# Altium PCB DONUt_v0.0.PcbDoc (part 2 of 2)
Units mm, origin at the board's own origin, x right, y up, seen from the top; angles counter-clockwise.
Board outline 170 x 70 mm, 2 copper layers (Top Layer, Bottom Layer); 266 components, 203 nets, 883 pads, 488 vias.
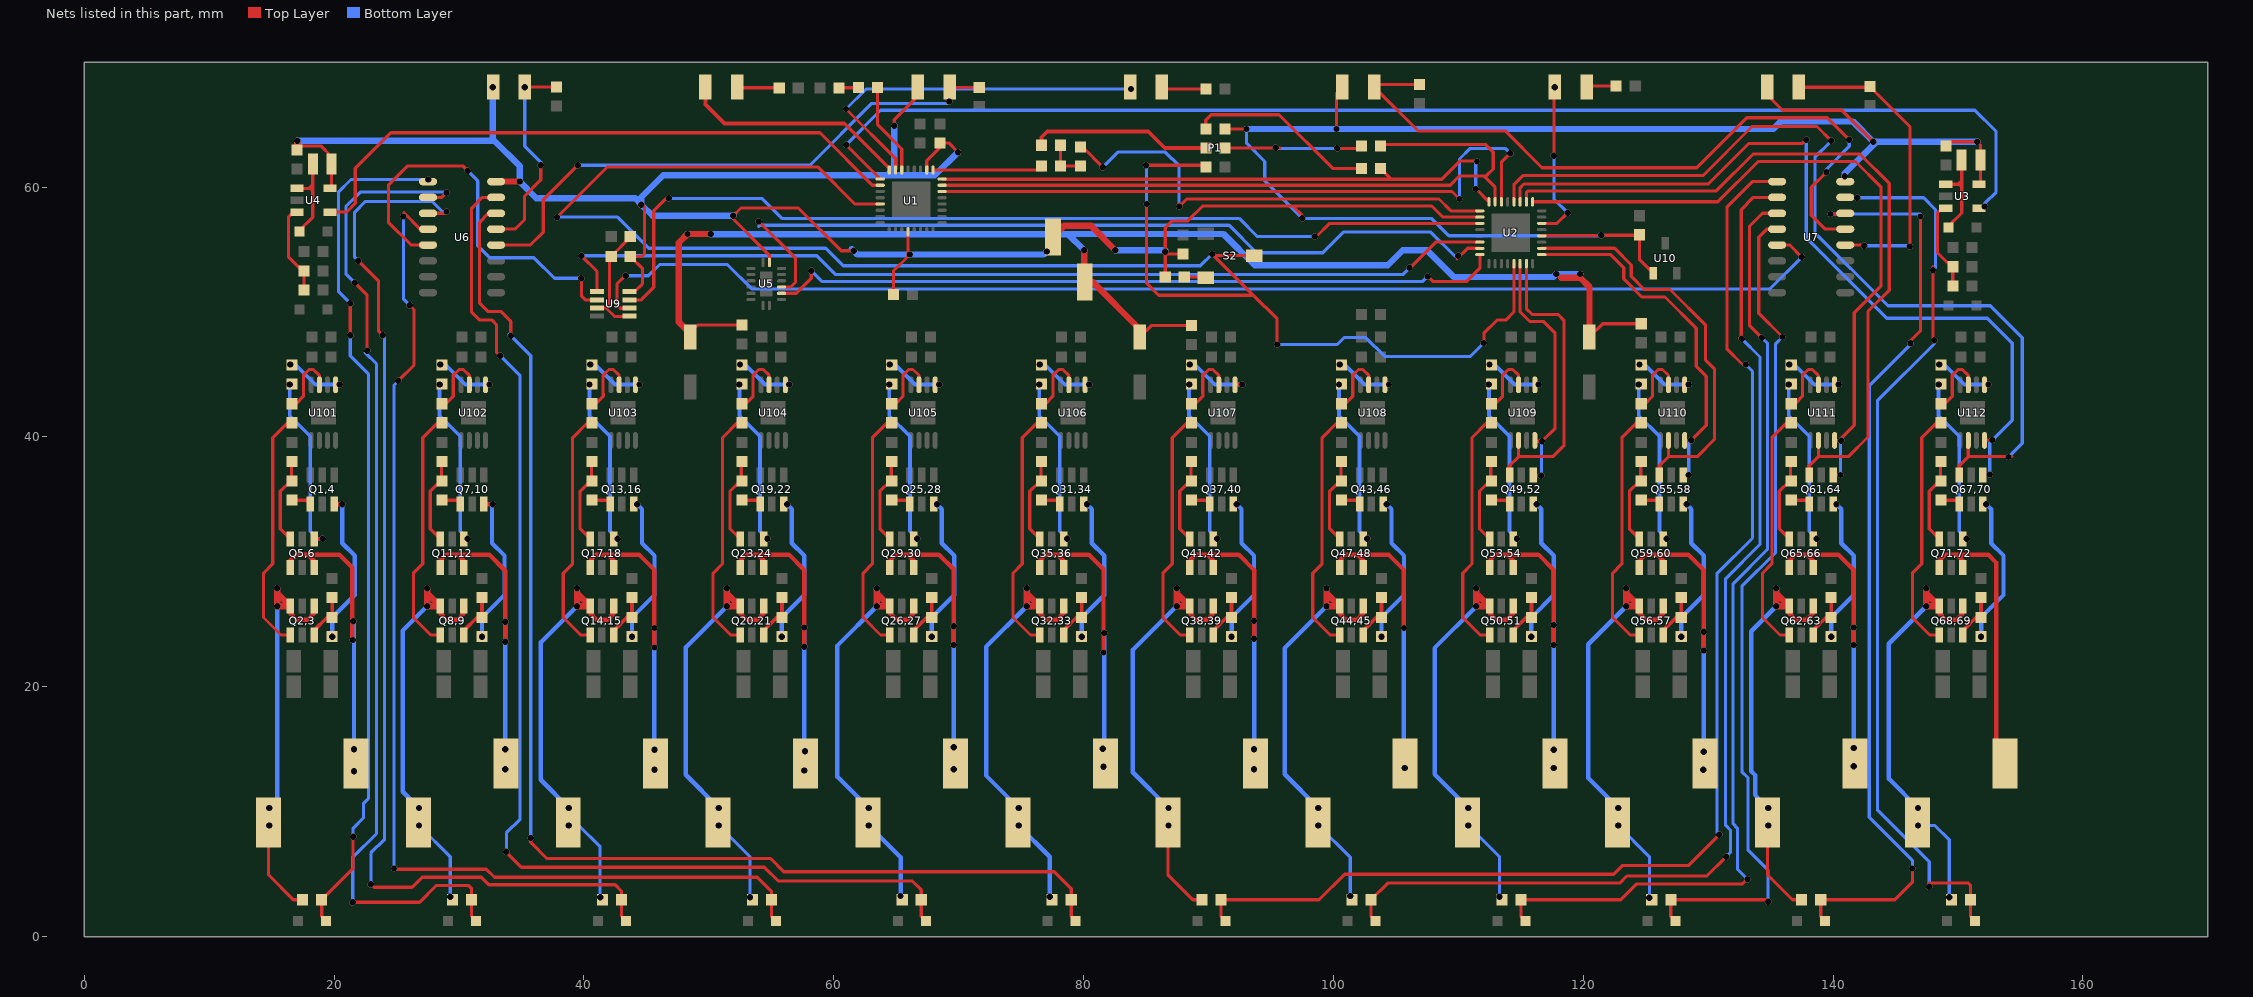
[diagram p2: the nets of this part, all layers, seen from the top]

## Via types
v1: diameter 0.508, hole 0.508, Top Layer to Bottom Layer, 488 vias

## Nets (pads, with @x,y where several pads share a name; then routed paths per layer and width w, separated by ;. In a path a pad name is that pad's centre, name@x,y a point inside that pad or via, vN(x,y) a via of type N, cw(c..) or ccw(c..) an arc to the next point about the centre after c; other vN are vias at no path point) (continued)
M9+: Q49,52.1 U2.30 U109.4 | length 20.3
  Top Layer w0.254: U2.30@114.95,53.875 114.95,50 115.7,49.25 116.8,49.25 117.75,48.3 117.75,40.7 v1(116.7,39.65) U109.4@116.2,39.65 ; 116.05,36.9 v1(116.65,36.9)
  Bottom Layer w0.254: v1(116.65,36.9) 116.65,39.6 v1(116.7,39.65)
M9-: Q49,52.3 U2.31 U109.2 | length 24.1
  Top Layer w0.254: 114.1,36.95 114.1,37.7 114.825,38.425 ; U109.2@114.825,39.725 114.825,38.425 ; U2.31@115.45,53.875 115.45,50.275 115.925,49.8 118,49.8 118.45,49.35 118.45,39.3 117.575,38.425 114.825,38.425
M10+: Q55,58.1 U2.1 U110.4 | length 28.5
  Top Layer w0.254: U2.1@116.675,54.6 122.2,54.6 123.25,53.55 123.25,52.65 124.7,51.2 126.55,51.2 129.05,48.7 129.05,45.65 129.85,44.85 129.85,40.925 v1(128.65,39.725) U110.4@128.125,39.725
  Bottom Layer w0.254: v1(128.45,36.95) 128.45,39.525 v1(128.65,39.725)
M10-: Q55,58.3 U2.2 U110.2 | length 33
  Top Layer w0.254: U2.2@116.675,55.1 122.515,55.1 123.85,53.765 123.85,52.85 124.9,51.8 126.95,51.8 129.8,48.95 129.8,46.15 130.5,45.45 130.5,39.8 129.125,38.425 126.825,38.425 ; 126.1,36.95 126.1,37.7 126.825,38.425 ; U110.2@126.825,39.725 126.825,38.425
M11+: Q61,64.1 U2.9 U111.4 | length 55.6
  Top Layer w0.254: U2.9@115.95,58.825 130.775,58.825 134,62.05 141.8,62.05 143.85,60 143.85,52.1 141.7,49.95 141.7,40.95 140.65,39.9 v1(140.65,39.7) U111.4@140.15,39.7 ; 140,36.95 v1(140.6,36.95)
  Bottom Layer w0.254: v1(140.6,36.95) 140.6,39.65 v1(140.65,39.7)
M11-: Q61,64.3 U2.10 U111.2 | length 60.7
  Top Layer w0.254: U2.10@115.45,58.825 115.45,59.55 115.6,59.7 130.65,59.7 133.6,62.65 142.15,62.65 144.5,60.3 144.5,51.75 142.8,50.05 142.8,40 141.225,38.425 138.825,38.425 ; 138.1,36.95 138.1,37.7 138.825,38.425 ; U111.2@138.825,39.725 138.825,38.425
M12+: Q67,70.1 U2.11 U112.4 | length 65.3
  Top Layer w0.254: U2.11@114.95,58.825 114.95,59.95 115.25,60.25 130.025,60.25 ; 130.063,60.287 133.275,63.5 137.55,63.5 v1(137.85,63.8) ; U112.4@152.15,39.75 v1(152.75,39.75)
  Bottom Layer w0.254: v1(137.85,63.8) 137.85,55.95 138.4,55.4 144.3,49.5 152.35,49.5 154.35,47.5 154.35,41.35 v1(152.75,39.75) 152.55,39.55 v1(152.55,37)
M12-: Q67,70.3 U2.12 U112.2 | length 73.8
  Top Layer w0.254: U2.12@114.45,58.825 114.45,60.2 115.175,60.925 129.588,60.925 133.513,64.85 138.716,64.85 v1(139.844,63.722) ; 150.1,36.95 150.1,37.7 150.825,38.425 ; U112.2@150.825,39.725 150.825,38.425 ; 154.325,38.425 150.825,38.425
  Bottom Layer w0.254: v1@139.844,63.75 v1(139.844,63.722) 139.844,63.694 138.55,62.4 138.55,56.35 144.4,50.5 152.6,50.5 155.15,47.95 155.15,39.5 v1(154.05,38.4)
MISO: R3.2 U1.16 U2.16 | length 48.4
  Top Layer w0.254: U1.16@68.675,60.65 68.692,60.633 104.629,60.633 ; R3.2@103.762,61.5 104.629,60.633 ; v1(111.4,59.85) 111.425,59.85 U2.16@112.45,58.825 ; v1(111.5,62.05) 111.45,62.1 110.15,62.1 108.683,60.633 104.629,60.633
  Bottom Layer w0.254: v1(111.4,59.85) 111.4,61.95 v1(111.5,62.05)
MISO_PRGM: P1.1 R3.1 | length 15.1
  Top Layer w0.254: P1.1@89.788,64.662 89.788,65.363 90.225,65.8 95.65,65.8 99.95,61.5 R3.1@102.238,61.5
MOSI: R5.2 U1.15 U2.15 | length 57.7
  Top Layer w0.254: U1.15@68.675,60.15 109.35,60.15 110.1,60.9 112.025,60.9 ; R5.2@103.862,63.4 112.2,63.4 112.8,62.8 112.8,61.45 112.25,60.9 112.025,60.9 ; U2.15@112.95,58.825 112.95,59.975 112.025,60.9
MOSI_PRGM: P1.4 R5.1 | length 11
  Top Layer w0.254: P1.4@91.312,63.138 v1(95.4,63.138) 95.738,63.138 ; v1(100.3,63.1) R5.1@102.038,63.1
  Bottom Layer w0.254: v1@95.512,63.1 v1(100.3,63.1)
mux1_out: U6.5 U9.2 | length 32.5
  Top Layer w0.254: U6.5@27.525,55.365 26.173,55.365 24.35,57.188 24.35,60.15 25.9,61.7 30.3,61.7 v1(30.7,61.3) ; v1(39.8,52.7) 39.8,51.3 40.125,50.975 U9.2@41.05,50.975
  Bottom Layer w0.254: v1(30.7,61.3) 31.5,60.5 31.5,55.3 32.45,54.35 36,54.35 37.65,52.7 v1(39.8,52.7)
mux2_out: U7.5 U9.6 | length 102.6
  Top Layer w0.254: v1(43.35,52.9) 43.3,52.9 42.65,52.25 42.65,50.55 42.9,50.3 U9.6@43.725,50.3 ; U7.5@135.525,55.365 136.535,55.365 v1(137.5,54.4)
  Bottom Layer w0.254: v1(43.35,52.9) 45.15,52.9 46.05,53.8 51.5,53.8 53.45,51.85 119.65,51.85 134.95,51.85 v1(137.5,54.4)
NetB1_1: B1.1 B2.1 B3.1 C314.2 C315.2 C316.2 S1.2 | length 116.2
  Top Layer w0.254: B1.1@48.5,48 48.5,48.3 48.5,48.35 49.112,48.962 C314.2@52.65,48.962 ; B2.1@84.5,48 85.412,48.912 C315.2@88.65,48.912 C315.2@88.403,48.665 ; B3.1@120.5,48 121.562,49.062 C316.2@124.65,49.062
  Top Layer w0.508: B1.1@48.5,48.3 47.6,49.2 47.6,55.55 v1(48.3,56.25) v1(50.15,56.25) ; S1.2@80.05,52.445 v1(80.05,54.95) ; S1.2@80.095,52.4 80.725,52.4 84.5,48.625 B2.1@84.5,48 ; 118.25,52.75 119.75,52.75 120.5,52 B3.1@120.5,48
  Bottom Layer w0.508: v1(48.3,56.25) v1(50.15,56.25) 50.166,56.234 78.734,56.234 78.75,56.25 ; v1(80.05,54.95) 78.75,56.25 ; v1(119.75,53.05) v1(117.85,53.05) 117.6,52.8 109.65,52.8 107.5,54.95 105.555,54.95 104.355,53.75 93.7,53.75 91.2,56.25 78.75,56.25
NetD1_1: D1.1 U1.22 | length 7.4
  Top Layer w0.254: D1.1@63.512,67.962 63.512,64.988 65.449,63.051 U1.22@65.449,61.376
NetD1_2: D1.2 R7.1 | length 1.6
  Top Layer w0.3: R7.1@60.412,67.95 D1.2@61.976,67.95
NetD2_1: D2.1 U1.23 | length 30
  Top Layer w0.254: v1(60.988,66.25) 64.931,62.307 ; U1.23@64.95,61.375 64.95,62.288
  Bottom Layer w0.254: v1(60.988,66.25) 62.588,67.85 v1(83.8,67.85)
NetD2_2: D2.2 R8.2 | length 3.4
  Top Layer w0.254: D2.2@86.42,67.85 R8.2@89.788,67.85
NetD3_1: D3.1 U1.24 | length 18.3
  Top Layer w0.254: 60.85,65.1 64.45,61.5 U1.24@64.45,61.375
  Top Layer w0.3: D3.1@49.73,68 49.73,66.62 51.25,65.1 60.85,65.1
NetD3_2: D3.2 R9.2 | length 3.3
  Top Layer w0.3: D3.2@52.32,67.95 R9.2@55.638,67.95
NetD4_1: D4.1 U2.6 | length 12.9
  Top Layer w0.254: U2.6@116.675,57.1 117.9,57.1 v1(118.75,57.95) ; v1(117.65,62.5) D4.1@117.65,67.92
  Bottom Layer w0.254: v1(117.65,62.5) 117.65,59.05 v1(118.75,57.95)
  other v1: 117.73,68
NetD4_2: D4.2 R10.2 | length 2.3
  Top Layer w0.254: D4.2@120.37,68.1 R10.2@122.638,68.1
NetD301_A: D301.A L1.2 U3.1 | length 8
  Top Layer w0.254: U3.1@149.025,60.225 150.025,60.225 ; D301.A@149.23,56.775 149.23,56.855 150.3,57.925 150.3,60.225 ; L1.2@150.3,62.175 150.3,60.5 ; 150.025,60.225 150.1,60.225 ; 150.025,60.225 150.3,60.5 ; 150.1,60.225 150.3,60.225 ; 150.1,60.225 150.3,60.025 150.3,60.225 ; 150.3,60.225 150.3,60.5
NetD302_A: D302.A L2.2 U4.1 | length 8
  Top Layer w0.254: U4.1@17.025,59.9 18.025,59.9 ; D302.A@17.23,56.45 17.23,56.53 18.3,57.6 18.3,59.9 ; L2.2@18.3,61.85 18.3,60.175 ; 18.025,59.9 18.3,60.175 ; 18.025,59.9 18.1,59.9 ; 18.1,59.9 18.3,59.7 18.3,59.9 ; 18.1,59.9 18.3,59.9 ; 18.3,59.9 18.3,60.175
NetM1_1: M1.1 Q5,6.4 Q5,6.6 | length 25.8
  Top Layer w0.356: 16.5,29.55 16.5,30.111 16.971,30.582 17.929,30.582 ; 18.4,29.55 18.4,30.1 18.182,30.318 18.182,30.329 17.929,30.582 ; M1.1@21.05,14.55 M1.1@21.45,14.95 ; v1(21.5,23.75) 21.45,23.8 21.45,29.55 20.418,30.582 17.929,30.582
  Bottom Layer w0.356: v1(21.55,25.25) 21.6,25.2 v1(21.6,15) v1(21.6,13.25)
NetM1_2: M1.2 Q2,3.4 Q2,3.6 R173.2 | length 34.8
  Top Layer w0.254: M1.2@14.75,9.15 14.75,4.95 16.75,2.95 R173.2@17.488,2.95
  Top Layer w0.356: M1.2@15.1,10.1 M1.2@15.4,9.8 ; 16.5,26.45 16.5,25.889 17.039,25.35 17.861,25.35 18.4,25.889 18.4,26.45
  Top Layer w0.508: v1@15.45,27.75 15.45,27.5 ; 15.45,27.5 16.5,26.45 v1(15.45,26.45) 15.45,27.5
  Bottom Layer w0.356: v1(14.8,8.9) v1(14.8,10.3) 15.45,10.95 v1(15.45,26.45) v1(15.45,27.9)
NetM2_1: M2.1 Q11,12.4 Q11,12.6 | length 25.2
  Top Layer w0.356: 28.5,29.55 28.5,30.111 28.971,30.582 29.929,30.582 ; 30.4,29.55 30.4,30.1 30.182,30.318 30.182,30.329 29.929,30.582 ; v1(33.7,23.6) v1(33.7,25.2) 33.7,29.3 32.418,30.582 29.929,30.582
  Bottom Layer w0.356: v1(33.7,13.4) v1(33.7,15) v1(33.7,23.6) v1(33.7,25.2)
NetM2_2: M2.2 Q8,9.4 Q8,9.6 R174.2 | length 34.8
  Top Layer w0.356: M2.2@27.1,10.1 M2.2@27.4,9.8 ; 28.5,26.45 28.5,25.889 29.039,25.35 29.861,25.35 30.4,25.889 30.4,26.45
  Top Layer w0.508: v1@27.45,27.75 27.45,27.5 ; 27.45,27.5 28.5,26.45 v1(27.45,26.45) 27.45,27.5
  Bottom Layer w0.254: v1(26.8,8.9) 29.3,6.4 v1(29.3,3.2)
  Bottom Layer w0.356: v1(26.8,8.9) v1(26.8,10.3) 25.5,11.6 25.5,24.5 v1(27.45,26.45) v1(27.45,27.9)
NetM3_1: M3.1 Q17,18.4 Q17,18.6 | length 25.2
  Top Layer w0.356: 40.5,29.55 40.5,30.111 40.971,30.582 41.929,30.582 ; 42.4,29.55 42.4,30.1 42.182,30.318 42.182,30.329 41.929,30.582 ; v1(45.65,23.15) v1(45.65,24.7) 45.65,29.35 44.418,30.582 41.929,30.582
  Bottom Layer w0.356: v1(45.65,13.35) v1(45.65,14.95) v1(45.65,23.15) v1(45.65,24.7)
NetM3_2: M3.2 Q14,15.4 Q14,15.6 R175.2 | length 36.1
  Top Layer w0.356: M3.2@39.1,10.1 M3.2@39.4,9.8 ; 40.5,26.45 40.5,25.889 41.039,25.35 41.861,25.35 42.4,25.889 42.4,26.45
  Top Layer w0.508: v1@39.45,27.75 39.45,27.5 ; 39.45,27.5 40.5,26.45 v1(39.45,26.45) 39.45,27.5
  Bottom Layer w0.254: v1(38.8,8.9) 39.6,8.9 41.3,7.2 v1(41.3,3.15)
  Bottom Layer w0.356: v1(38.8,8.9) v1(38.8,10.3) 36.55,12.55 36.55,23.55 v1(39.45,26.45) v1(39.45,27.9)
NetM4_1: M4.1 Q23,24.4 Q23,24.6 | length 26.1
  Top Layer w0.356: 52.5,29.55 52.5,30.111 52.971,30.582 53.929,30.582 ; 54.4,29.55 54.4,30.1 54.182,30.318 54.182,30.329 53.929,30.582 ; M4.1@57.05,14.55 M4.1@57.65,15.15 ; v1(57.65,23.2) v1(57.65,24.75) 57.65,29.35 56.418,30.582 53.929,30.582
  Bottom Layer w0.356: v1(57.65,13.3) v1(57.65,23.2) v1(57.65,24.75)
  other v1: 57.7,14.85
NetM4_2: M4.2 Q20,21.4 Q20,21.6 R176.2 | length 36
  Top Layer w0.356: M4.2@51.1,10.1 M4.2@51.4,9.8 ; 52.5,26.45 52.5,25.889 53.039,25.35 53.861,25.35 54.4,25.889 54.4,26.45
  Top Layer w0.508: v1@51.45,27.75 51.45,27.5 ; 51.45,27.5 52.5,26.45 v1(51.45,26.45) 51.45,27.5
  Bottom Layer w0.254: v1(50.8,8.9) 53.3,6.4 v1(53.3,3.15)
  Bottom Layer w0.356: v1(50.8,8.9) v1(50.8,10.3) 48.15,12.95 48.15,23.15 v1(51.45,26.45) v1(51.45,27.9)
NetM5_1: M5.1 Q29,30.4 Q29,30.6 | length 25.9
  Top Layer w0.356: 64.5,29.55 64.5,30.111 64.971,30.582 65.929,30.582 ; 66.4,29.55 66.4,30.1 66.182,30.318 66.182,30.329 65.929,30.582 ; M5.1@69.05,14.55 M5.1@69.6,15.1 ; v1(69.6,23.35) v1(69.6,24.85) 69.6,29.4 68.418,30.582 65.929,30.582
  Bottom Layer w0.356: v1(69.6,13.4) v1(69.6,15.15) v1(69.6,23.35) v1(69.6,24.85)
NetM5_2: M5.2 Q26,27.4 Q26,27.6 R177.2 | length 35.8
  Top Layer w0.356: M5.2@63.1,10.1 M5.2@63.4,9.8 ; 64.5,26.45 64.5,25.889 65.039,25.35 65.861,25.35 66.4,25.889 66.4,26.45
  Top Layer w0.508: v1@63.45,27.75 63.45,27.5 ; 63.45,27.5 64.5,26.45 v1(63.45,26.45) 63.45,27.5
  Bottom Layer w0.356: v1(63.45,27.9) v1(63.45,26.45) 60.3,23.3 60.3,12.8 v1(62.8,10.3) v1(62.8,8.9) 65.35,6.35 v1(65.35,3.25)
NetM6_1: M6.1 Q35,36.4 Q35,36.6 | length 25.7
  Top Layer w0.356: 76.5,29.55 76.5,30.111 76.971,30.582 77.929,30.582 ; 78.4,29.55 78.4,30.1 78.182,30.318 78.182,30.329 77.929,30.582 ; M6.1@81.05,14.55 M6.1@81.6,15.1 ; v1(81.6,22.75) 81.6,29.4 80.418,30.582 77.929,30.582
  Bottom Layer w0.356: v1(81.6,13.6) 81.65,13.65 v1(81.65,24.3)
  other v1: 81.55,15.05
NetM6_2: M6.2 Q32,33.4 Q32,33.6 R178.2 | length 35.9
  Top Layer w0.356: M6.2@75.1,10.1 M6.2@75.4,9.8 ; 76.5,26.45 76.5,25.889 77.039,25.35 77.861,25.35 78.4,25.889 78.4,26.45
  Top Layer w0.508: v1@75.45,27.75 75.45,27.5 ; 75.45,27.5 76.5,26.45 v1(75.45,26.45) 75.45,27.5
  Bottom Layer w0.356: v1(75.45,27.9) v1(75.45,26.45) 72.2,23.2 72.2,12.9 v1(74.8,10.3) v1(74.8,8.9) 77.3,6.4 v1(77.3,3.2)
NetM7_1: M7.1 Q41,42.4 Q41,42.6 | length 25.9
  Top Layer w0.356: 88.5,29.55 88.5,30.111 88.971,30.582 89.929,30.582 ; 90.4,29.55 90.4,30.1 90.182,30.318 90.182,30.329 89.929,30.582 ; M7.1@93.05,14.55 M7.1@93.65,15.15 ; v1(93.65,23.85) v1(93.65,25.3) 93.65,29.35 92.418,30.582 89.929,30.582
  Bottom Layer w0.356: v1(93.65,13.4) v1(93.65,15) v1(93.65,23.85) v1(93.65,25.3)
NetM7_2: M7.2 Q38,39.4 Q38,39.6 R179.2 | length 37.1
  Top Layer w0.254: M7.2@86.75,9.15 86.75,4.95 88.75,2.95 R179.2@89.488,2.95
  Top Layer w0.356: M7.2@87.1,10.1 M7.2@87.4,9.8 ; 88.5,26.45 88.5,25.889 89.039,25.35 89.861,25.35 90.4,25.889 90.4,26.45
  Top Layer w0.508: v1@87.45,27.75 87.45,27.5 ; 87.45,27.5 88.5,26.45 v1(87.45,26.45) 87.45,27.5
  Bottom Layer w0.356: v1(86.8,8.9) v1(86.8,10.3) 83.95,13.15 83.95,22.95 v1(87.45,26.45) v1(87.45,27.9)
NetM8_1: M8.1 Q47,48.4 Q47,48.6 | length 23.4
  Top Layer w0.356: 100.5,29.55 100.5,30.111 100.971,30.582 101.929,30.582 ; 102.4,29.55 102.4,30.1 102.182,30.318 102.182,30.329 101.929,30.582 ; v1(105.65,24.7) 105.65,29.35 104.418,30.582 101.929,30.582
  Bottom Layer w0.356: v1@105.65,13.55 v1(105.65,24.7)
  other v1: 105.7,13.5
NetM8_2: M8.2 Q44,45.4 Q44,45.6 R180.2 | length 35.9
  Top Layer w0.356: M8.2@99.1,10.1 M8.2@99.4,9.8 ; 100.5,26.45 100.5,25.889 101.039,25.35 101.861,25.35 102.4,25.889 102.4,26.45
  Top Layer w0.508: v1@99.45,27.75 99.45,27.5 ; 99.45,27.5 100.5,26.45 v1(99.45,26.45) 99.45,27.5
  Bottom Layer w0.254: v1(98.8,8.9) 101.35,6.35 v1(101.35,3.25)
  Bottom Layer w0.356: v1(98.8,8.9) v1(98.8,10.3) 96.1,13 96.1,23.1 v1(99.45,26.45) v1(99.45,27.9)
NetM9_1: M9.1 Q53,54.4 Q53,54.6 | length 25.9
  Top Layer w0.356: 112.5,29.55 112.5,30.111 112.971,30.582 113.929,30.582 ; 114.4,29.55 114.4,30.1 114.182,30.318 114.182,30.329 113.929,30.582 ; M9.1@117.05,14.55 M9.1@117.65,15.15 ; v1(117.65,23.35) v1(117.65,24.95) 117.65,29.35 116.418,30.582 113.929,30.582
  Bottom Layer w0.356: v1(117.65,13.5) v1(117.65,14.95) v1(117.65,23.35) v1(117.65,24.95)
NetM9_2: M9.2 Q50,51.4 Q50,51.6 R181.2 | length 36
  Top Layer w0.356: M9.2@111.1,10.1 M9.2@111.4,9.8 ; 112.5,26.45 112.5,25.889 113.039,25.35 113.861,25.35 114.4,25.889 114.4,26.45
  Top Layer w0.508: v1@111.45,27.75 111.45,27.5 ; 111.45,27.5 112.5,26.45 v1(111.45,26.45) 111.45,27.5
  Bottom Layer w0.254: v1(110.8,8.9) 113.3,6.4 v1(113.3,3.2)
  Bottom Layer w0.356: v1(110.8,8.9) v1(110.8,10.3) 108.1,13 108.1,23.1 v1(111.45,26.45) v1(111.45,27.9)
NetM10_1: M10.1 Q59,60.4 Q59,60.6 | length 26
  Top Layer w0.356: 124.5,29.55 124.5,30.111 124.971,30.582 125.929,30.582 ; 126.4,29.55 126.4,30.1 126.182,30.318 126.182,30.329 125.929,30.582 ; M10.1@129.05,14.55 M10.1@129.65,15.15 ; v1(129.65,22.9) v1(129.65,24.4) 129.65,29.35 128.418,30.582 125.929,30.582
  Bottom Layer w0.356: v1(129.6,13.35) 129.65,13.4 v1(129.65,14.8) v1(129.65,22.9) v1(129.65,24.4)
NetM10_2: M10.2 Q56,57.4 Q56,57.6 R182.2 | length 35.8
  Top Layer w0.356: M10.2@123.1,10.1 M10.2@123.4,9.8 ; 124.5,26.45 124.5,25.889 125.039,25.35 125.861,25.35 126.4,25.889 126.4,26.45
  Top Layer w0.508: v1@123.45,27.75 123.45,27.5 ; 123.45,27.5 124.5,26.45 v1(123.45,26.45) 123.45,27.5
  Bottom Layer w0.254: v1(122.8,8.9) 125.3,6.4 v1(125.3,3.1)
  Bottom Layer w0.356: v1(122.8,8.9) v1(122.8,10.3) 120.4,12.7 120.4,23.4 v1(123.45,26.45) v1(123.45,27.9)
NetM11_1: M11.1 Q65,66.4 Q65,66.6 | length 25.6
  Top Layer w0.356: 136.5,29.55 136.5,30.111 136.971,30.582 137.929,30.582 ; 138.4,29.55 138.4,30.1 138.182,30.318 138.182,30.329 137.929,30.582 ; M11.1@141.05,14.55 M11.1@141.65,15.15 ; v1(141.65,23.35) 141.65,29.35 140.418,30.582 137.929,30.582
  Bottom Layer w0.356: v1(141.65,13.65) v1(141.65,23.35) v1(141.65,24.75)
  other v1: 141.65,15.1
NetM11_2: M11.2 Q62,63.4 Q62,63.6 R183.2 | length 35.9
  Top Layer w0.254: M11.2@134.75,9.15 134.75,4.95 136.75,2.95 R183.2@137.488,2.95
  Top Layer w0.356: M11.2@135.1,10.1 M11.2@135.4,9.8 ; 136.5,26.45 136.5,25.889 137.039,25.35 137.861,25.35 138.4,25.889 138.4,26.45
  Top Layer w0.508: v1@135.45,27.75 135.45,27.5 ; 135.45,27.5 136.5,26.45 v1(135.45,26.45) 135.45,27.5
  Bottom Layer w0.356: v1(134.8,8.9) v1(134.8,10.3) 133.759,11.341 133.759,12.931 133.45,13.24 133.45,24.45 v1(135.45,26.45) v1(135.45,27.9)
NetM12_1: M12.1 Q71,72.4 Q71,72.6 | length 22.2
  Top Layer w0.356: 148.5,29.55 148.5,30.111 148.971,30.582 149.929,30.582 ; 150.4,29.55 150.4,30.1 150.182,30.318 150.182,30.329 149.929,30.582 ; M12.1@153.05,14.55 153.05,29.95 152.418,30.582 149.929,30.582
NetM12_2: M12.2 Q68,69.4 Q68,69.6 R184.2 | length 36.5
  Top Layer w0.356: M12.2@147.1,10.1 M12.2@147.4,9.8 ; 148.5,26.45 148.5,25.889 149.039,25.35 149.861,25.35 150.4,25.889 150.4,26.45
  Top Layer w0.508: v1@147.45,27.75 147.45,27.5 ; 147.45,27.5 148.5,26.45 v1(147.45,26.45) 147.45,27.5
  Bottom Layer w0.254: v1(146.8,8.9) 148.15,8.9 149.3,7.75 v1(149.3,3.15)
  Bottom Layer w0.356: v1(146.8,8.9) v1(146.8,10.3) 144.45,12.65 144.45,23.45 v1(147.45,26.45) v1(147.45,27.9)
NetQ1,4_4: Q1,4.4 R104.1 | length 1.6
  Top Layer w0.3: R104.1@16.65,34.938 17.812,34.938 18.1,34.65
NetQ1,4_6: Q1,4.6 R102.1 | length 12.4
  Top Layer w0.35: 20.05,34.6 v1(20.65,34.6)
  Bottom Layer w0.35: v1(19.85,24) 19.85,25.55 21.65,27.35 21.65,30.5 20.65,31.5 v1(20.65,34.6)
NetQ2,3_3: Q2,3.3 R101.1 R102.2 | length 3.8
  Top Layer w0.254: 18.4,24.15 18.4,24.5 ; R102.2@19.462,25.562 R102.2@19.85,25.562
  Top Layer w0.305: 18.4,24.5 R102.2@19.462,25.562 ; R102.2@19.85,25.562 R101.1@19.85,27.138
NetQ5,6_3: Q5,6.3 R103.1 R104.2 | length 6.9
  Top Layer w0.254: 16.5,31.85 15.7,32.65 15.7,35.65 16.512,36.462 16.6,36.462 R103.1@16.6,38.038
NetQ7,10_4: Q7,10.4 R110.1 | length 1.6
  Top Layer w0.3: R110.1@28.65,34.938 29.812,34.938 30.1,34.65
NetQ7,10_6: Q7,10.6 R108.1 | length 12.4
  Top Layer w0.35: 32.05,34.6 v1(32.7,34.6)
  Bottom Layer w0.35: v1(31.85,24) 31.85,25.55 33.65,27.35 33.65,30.5 32.65,31.5 32.65,34.55 v1(32.7,34.6)
NetQ8,9_3: Q8,9.3 R107.1 R108.2 | length 3.8
  Top Layer w0.254: 30.4,24.15 30.4,24.5 ; R108.2@31.462,25.562 R108.2@31.85,25.562
  Top Layer w0.305: 30.4,24.5 R108.2@31.462,25.562 ; R108.2@31.85,25.562 R107.1@31.85,27.138
NetQ11,12_3: Q11,12.3 R109.1 R110.2 | length 6.9
  Top Layer w0.254: 28.5,31.85 27.7,32.65 27.7,35.65 28.512,36.462 28.6,36.462 R109.1@28.6,38.038
NetQ13,16_4: Q13,16.4 R116.1 | length 1.6
  Top Layer w0.3: R116.1@40.65,34.938 41.812,34.938 42.1,34.65
NetQ13,16_6: Q13,16.6 R114.1 | length 11.9
  Bottom Layer w0.35: v1(43.85,24) 43.85,25.55 45.65,27.35 45.65,30.5 44.65,31.5 44.65,34.225 v1(44.275,34.6)
NetQ14,15_3: Q14,15.3 R113.1 R114.2 | length 3.8
  Top Layer w0.254: 42.4,24.15 42.4,24.5 ; R114.2@43.462,25.562 R114.2@43.85,25.562
  Top Layer w0.305: 42.4,24.5 R114.2@43.462,25.562 ; R114.2@43.85,25.562 R113.1@43.85,27.138
NetQ17,18_3: Q17,18.3 R115.1 R116.2 | length 6.9
  Top Layer w0.254: 40.5,31.85 39.7,32.65 39.7,35.65 40.512,36.462 40.6,36.462 R115.1@40.6,38.038
NetQ19,22_4: Q19,22.4 R122.1 | length 1.6
  Top Layer w0.3: R122.1@52.65,34.938 53.812,34.938 54.1,34.65
NetQ19,22_6: Q19,22.6 R120.1 | length 11.9
  Bottom Layer w0.35: v1(55.85,24) 55.85,25.55 57.65,27.35 57.65,30.5 56.65,31.5 56.65,34.225 v1(56.275,34.6)
NetQ20,21_3: Q20,21.3 R119.1 R120.2 | length 3.8
  Top Layer w0.254: 54.4,24.15 54.4,24.5 ; R120.2@55.462,25.562 R120.2@55.85,25.562
  Top Layer w0.305: 54.4,24.5 R120.2@55.462,25.562 ; R120.2@55.85,25.562 R119.1@55.85,27.138
NetQ23,24_3: Q23,24.3 R121.1 R122.2 | length 6.9
  Top Layer w0.254: 52.5,31.85 51.7,32.65 51.7,35.65 52.512,36.462 52.6,36.462 R121.1@52.6,38.038
NetQ25,28_4: Q25,28.4 R128.1 | length 1.6
  Top Layer w0.3: R128.1@64.65,34.938 65.812,34.938 66.1,34.65
NetQ25,28_6: Q25,28.6 R126.1 | length 11.9
  Bottom Layer w0.35: v1(67.85,24) 67.85,25.55 69.65,27.35 69.65,30.5 68.65,31.5 68.65,34.225 v1(68.275,34.6)
NetQ26,27_3: Q26,27.3 R125.1 R126.2 | length 3.8
  Top Layer w0.254: 66.4,24.15 66.4,24.5 ; R126.2@67.462,25.562 R126.2@67.85,25.562
  Top Layer w0.305: 66.4,24.5 R126.2@67.462,25.562 ; R126.2@67.85,25.562 R125.1@67.85,27.138
NetQ29,30_3: Q29,30.3 R127.1 R128.2 | length 6.9
  Top Layer w0.254: 64.5,31.85 63.7,32.65 63.7,35.65 64.512,36.462 64.6,36.462 R127.1@64.6,38.038
NetQ31,34_4: Q31,34.4 R134.1 | length 1.6
  Top Layer w0.3: R134.1@76.65,34.938 77.812,34.938 78.1,34.65
NetQ31,34_6: Q31,34.6 R132.1 | length 11.9
  Bottom Layer w0.35: v1(79.85,24) 79.85,25.55 81.65,27.35 81.65,30.5 80.65,31.5 80.65,34.225 v1(80.275,34.6)
NetQ32,33_3: Q32,33.3 R131.1 R132.2 | length 3.8
  Top Layer w0.254: 78.4,24.15 78.4,24.5 ; R132.2@79.462,25.562 R132.2@79.85,25.562
  Top Layer w0.305: 78.4,24.5 R132.2@79.462,25.562 ; R132.2@79.85,25.562 R131.1@79.85,27.138
NetQ35,36_3: Q35,36.3 R133.1 R134.2 | length 6.9
  Top Layer w0.254: 76.5,31.85 75.7,32.65 75.7,35.65 76.512,36.462 76.6,36.462 R133.1@76.6,38.038
NetQ37,40_4: Q37,40.4 R140.1 | length 1.6
  Top Layer w0.3: R140.1@88.65,34.938 89.812,34.938 90.1,34.65
NetQ37,40_6: Q37,40.6 R138.1 | length 11.9
  Bottom Layer w0.35: v1(91.85,24) 91.85,25.55 93.65,27.35 93.65,30.5 92.65,31.5 92.65,34.225 v1(92.275,34.6)
NetQ38,39_3: Q38,39.3 R137.1 R138.2 | length 3.8
  Top Layer w0.254: 90.4,24.15 90.4,24.5 ; R138.2@91.462,25.562 R138.2@91.85,25.562
  Top Layer w0.305: 90.4,24.5 R138.2@91.462,25.562 ; R138.2@91.85,25.562 R137.1@91.85,27.138
NetQ41,42_3: Q41,42.3 R139.1 R140.2 | length 6.9
  Top Layer w0.254: 88.5,31.85 87.7,32.65 87.7,35.65 88.512,36.462 88.6,36.462 R139.1@88.6,38.038
NetQ43,46_4: Q43,46.4 R146.1 | length 1.6
  Top Layer w0.3: R146.1@100.65,34.938 101.812,34.938 102.1,34.65
NetQ43,46_6: Q43,46.6 R144.1 | length 11.9
  Bottom Layer w0.35: v1(103.85,24) 103.85,25.55 105.65,27.35 105.65,30.5 104.65,31.5 104.65,34.225 v1(104.275,34.6)
NetQ44,45_3: Q44,45.3 R143.1 R144.2 | length 3.8
  Top Layer w0.254: 102.4,24.15 102.4,24.5 ; R144.2@103.462,25.562 R144.2@103.85,25.562
  Top Layer w0.305: 102.4,24.5 R144.2@103.462,25.562 ; R144.2@103.85,25.562 R143.1@103.85,27.138
NetQ47,48_3: Q47,48.3 R145.1 R146.2 | length 6.9
  Top Layer w0.254: 100.5,31.85 99.7,32.65 99.7,35.65 100.512,36.462 100.6,36.462 R145.1@100.6,38.038
NetQ49,52_4: Q49,52.4 R152.1 | length 1.6
  Top Layer w0.3: R152.1@112.65,34.938 113.812,34.938 114.1,34.65
NetQ49,52_6: Q49,52.6 R150.1 | length 11.9
  Bottom Layer w0.35: v1(115.85,24) 115.85,25.55 117.65,27.35 117.65,30.5 116.65,31.5 116.65,34.225 v1(116.275,34.6)
NetQ50,51_3: Q50,51.3 R149.1 R150.2 | length 3.8
  Top Layer w0.254: 114.4,24.15 114.4,24.5 ; R150.2@115.462,25.562 R150.2@115.85,25.562
  Top Layer w0.305: 114.4,24.5 R150.2@115.462,25.562 ; R150.2@115.85,25.562 R149.1@115.85,27.138
NetQ53,54_3: Q53,54.3 R151.1 R152.2 | length 6.9
  Top Layer w0.254: 112.5,31.85 111.7,32.65 111.7,35.65 112.512,36.462 112.6,36.462 R151.1@112.6,38.038
NetQ55,58_4: Q55,58.4 R158.1 | length 1.6
  Top Layer w0.3: R158.1@124.65,34.938 125.812,34.938 126.1,34.65
NetQ55,58_6: Q55,58.6 R156.1 | length 11.9
  Bottom Layer w0.35: v1(127.85,24) 127.85,25.55 129.65,27.35 129.65,30.5 128.65,31.5 128.65,34.225 v1(128.275,34.6)
NetQ56,57_3: Q56,57.3 R155.1 R156.2 | length 3.8
  Top Layer w0.254: 126.4,24.15 126.4,24.5 ; R156.2@127.462,25.562 R156.2@127.85,25.562
  Top Layer w0.305: 126.4,24.5 R156.2@127.462,25.562 ; R156.2@127.85,25.562 R155.1@127.85,27.138
NetQ59,60_3: Q59,60.3 R157.1 R158.2 | length 6.9
  Top Layer w0.254: 124.5,31.85 123.7,32.65 123.7,35.65 124.512,36.462 124.6,36.462 R157.1@124.6,38.038
NetQ61,64_4: Q61,64.4 R164.1 | length 1.6
  Top Layer w0.3: R164.1@136.65,34.938 137.812,34.938 138.1,34.65
NetQ61,64_6: Q61,64.6 R162.1 | length 11.9
  Bottom Layer w0.35: v1(139.85,24) 139.85,25.55 141.65,27.35 141.65,30.5 140.65,31.5 140.65,34.225 v1(140.275,34.6)
NetQ62,63_3: Q62,63.3 R161.1 R162.2 | length 3.8
  Top Layer w0.254: 138.4,24.15 138.4,24.5 ; R162.2@139.462,25.562 R162.2@139.85,25.562
  Top Layer w0.305: 138.4,24.5 R162.2@139.462,25.562 ; R162.2@139.85,25.562 R161.1@139.85,27.138
NetQ65,66_3: Q65,66.3 R163.1 R164.2 | length 6.9
  Top Layer w0.254: 136.5,31.85 135.7,32.65 135.7,35.65 136.512,36.462 136.6,36.462 R163.1@136.6,38.038
NetQ67,70_4: Q67,70.4 R170.1 | length 1.6
  Top Layer w0.3: R170.1@148.65,34.938 149.812,34.938 150.1,34.65
NetQ67,70_6: Q67,70.6 R168.1 | length 11.9
  Bottom Layer w0.35: v1(151.85,24) 151.85,25.55 153.65,27.35 153.65,30.5 152.65,31.5 152.65,34.225 v1(152.275,34.6)
NetQ68,69_3: Q68,69.3 R167.1 R168.2 | length 3.8
  Top Layer w0.254: 150.4,24.15 150.4,24.5 ; R168.2@151.462,25.562 R168.2@151.85,25.562
  Top Layer w0.305: 150.4,24.5 R168.2@151.462,25.562 ; R168.2@151.85,25.562 R167.1@151.85,27.138
NetQ71,72_3: Q71,72.3 R169.1 R170.2 | length 6.9
  Top Layer w0.254: 148.5,31.85 147.7,32.65 147.7,35.65 148.512,36.462 148.6,36.462 R169.1@148.6,38.038
NetQ201_2: Q201.2 R204.1 U6.13 | length 16.8
  Top Layer w0.254: U6.13@32.975,56.635 34.485,56.635 35.25,57.4 35.25,59.275 36.55,60.575 v1(36.55,61.763) ; Q201.2@35.282,68.012 R204.1@37.8,68.012
  Bottom Layer w0.254: v1(35.27,68) 35.27,63.28 36.55,62 v1(36.55,61.763)
NetQ202_2: Q202.2 R203.1 U6.12 | length 46
  Top Layer w0.254: U6.12@32.975,55.365 35.715,55.365 36.75,56.4 36.75,59 v1(39.5,61.75) ; v1(69.25,66.85) Q202.2@69.25,67.98 ; Q202.2@69.308,67.962 R203.1@71.65,67.962
  Bottom Layer w0.254: v1(39.5,61.75) 58.1,61.75 63.05,66.7 69.1,66.7 v1(69.25,66.85)
NetQ203_2: Q203.2 R206.1 U7.13 | length 57
  Top Layer w0.254: Q203.2@103.27,68 106.77,64.5 113.75,64.5 116.7,61.55 129.1,61.55 133.1,65.55 139.55,65.55 v1(141.3,63.8) ; Q203.2@103.482,68.212 R206.1@106.9,68.212 ; v1(139.475,61.2) 138.25,59.975 138.25,57.75 139.365,56.635 U7.13@140.975,56.635
  Bottom Layer w0.254: v1(139.475,61.2) 139.475,61.437 141.3,63.262 v1(141.3,63.8)
NetQ204_2: Q204.2 R205.1 U7.12 | length 24.8
  Top Layer w0.254: Q204.2@137.27,68 143,68 146.15,64.85 v1(146.15,55.25) ; U7.12@140.975,55.365 v1@142.435,55.365
  Bottom Layer w0.254: v1(142.5,55.3) v1@146.1,55.3
NetR1_1: R1.1 R2.2 R4.2 | length 3.2
  Top Layer w0.254: R4.2@78.162,63.35 R1.1@78.162,61.7 R2.2@79.75,61.7
NetR6_2: R6.2 S2.3 | length 1.7
  Top Layer w0.254: R6.2@88.062,52.8 S2.3@89.749,52.8
NetR105_2: R105.2 U101.7 | length 5.3
  Top Layer w0.254: R105.2@16.65,42.662 16.962,42.662 17.55,43.25 17.55,43.483 17.544,43.489 17.544,44.933 18.011,45.4 18.35,45.4 18.825,44.925 U101.7@18.825,44.175
NetR106_2: R106.2 U101.5 | length 4.6
  Bottom Layer w0.3: v1(16.5,45.8) 16.9,45.8 18.5,44.2 v1(20.45,44.2)
NetR111_2: R111.2 U102.7 | length 5.3
  Top Layer w0.254: R111.2@28.65,42.662 28.962,42.662 29.55,43.25 29.55,43.483 29.544,43.489 29.544,44.933 30.011,45.4 30.35,45.4 30.825,44.925 U102.7@30.825,44.175
NetR112_2: R112.2 U102.5 | length 4.6
  Bottom Layer w0.3: v1(28.5,45.8) 28.9,45.8 30.5,44.2 v1(32.45,44.2)
NetR117_2: R117.2 U103.7 | length 5.3
  Top Layer w0.254: R117.2@40.65,42.662 40.962,42.662 41.55,43.25 41.55,43.483 41.544,43.489 41.544,44.933 42.011,45.4 42.35,45.4 42.825,44.925 U103.7@42.825,44.175
NetR118_2: R118.2 U103.5 | length 4.6
  Bottom Layer w0.3: v1(40.5,45.8) 40.9,45.8 42.5,44.2 v1(44.45,44.2)
NetR123_2: R123.2 U104.7 | length 5.3
  Top Layer w0.254: R123.2@52.65,42.662 52.962,42.662 53.55,43.25 53.55,43.483 53.544,43.489 53.544,44.933 54.011,45.4 54.35,45.4 54.825,44.925 U104.7@54.825,44.175
NetR124_2: R124.2 U104.5 | length 4.6
  Bottom Layer w0.3: v1(52.5,45.8) 52.9,45.8 54.5,44.2 v1(56.45,44.2)
NetR129_2: R129.2 U105.7 | length 5.3
  Top Layer w0.254: R129.2@64.65,42.662 64.962,42.662 65.55,43.25 65.55,43.483 65.544,43.489 65.544,44.933 66.011,45.4 66.35,45.4 66.825,44.925 U105.7@66.825,44.175
NetR130_2: R130.2 U105.5 | length 4.6
  Bottom Layer w0.3: v1(64.5,45.8) 64.9,45.8 66.5,44.2 v1(68.45,44.2)
NetR135_2: R135.2 U106.7 | length 5.3
  Top Layer w0.254: R135.2@76.65,42.662 76.962,42.662 77.55,43.25 77.55,43.483 77.544,43.489 77.544,44.933 78.011,45.4 78.35,45.4 78.825,44.925 U106.7@78.825,44.175
NetR136_2: R136.2 U106.5 | length 4.6
  Bottom Layer w0.3: v1(76.5,45.8) 76.9,45.8 78.5,44.2 v1(80.45,44.2)
NetR141_2: R141.2 U107.7 | length 5.3
  Top Layer w0.254: R141.2@88.65,42.662 88.962,42.662 89.55,43.25 89.55,43.483 89.544,43.489 89.544,44.933 90.011,45.4 90.35,45.4 90.825,44.925 U107.7@90.825,44.175
NetR142_2: R142.2 U107.5 | length 5.4
  Top Layer w0.3: U107.5@92.15,44.2 v1(92.7,44.2)
  Bottom Layer w0.3: v1(88.5,45.8) 88.9,45.8 90.5,44.2 v1(92.7,44.2)
NetR147_2: R147.2 U108.7 | length 5.3
  Top Layer w0.254: R147.2@100.65,42.662 100.962,42.662 101.55,43.25 101.55,43.483 101.544,43.489 101.544,44.933 102.011,45.4 102.35,45.4 102.825,44.925 U108.7@102.825,44.175
NetR148_2: R148.2 U108.5 | length 4.6
  Bottom Layer w0.3: v1(100.5,45.8) 100.9,45.8 102.5,44.2 v1(104.45,44.2)
NetR153_2: R153.2 U109.7 | length 5.3
  Top Layer w0.254: R153.2@112.65,42.662 112.962,42.662 113.55,43.25 113.55,43.483 113.544,43.489 113.544,44.933 114.011,45.4 114.35,45.4 114.825,44.925 U109.7@114.825,44.175
NetR154_2: R154.2 U109.5 | length 4.6
  Bottom Layer w0.3: v1(112.5,45.8) 112.9,45.8 114.5,44.2 v1(116.45,44.2)
NetR159_2: R159.2 U110.7 | length 5.3
  Top Layer w0.254: R159.2@124.65,42.662 124.962,42.662 125.55,43.25 125.55,43.483 125.544,43.489 125.544,44.933 126.011,45.4 126.35,45.4 126.825,44.925 U110.7@126.825,44.175
NetR160_2: R160.2 U110.5 | length 4.6
  Bottom Layer w0.3: v1(124.5,45.8) 124.9,45.8 126.5,44.2 v1(128.45,44.2)
NetR165_2: R165.2 U111.7 | length 5.3
  Top Layer w0.254: R165.2@136.65,42.662 136.962,42.662 137.55,43.25 137.55,43.483 137.544,43.489 137.544,44.933 138.011,45.4 138.35,45.4 138.825,44.925 U111.7@138.825,44.175
NetR166_2: R166.2 U111.5 | length 4.6
  Bottom Layer w0.3: v1(136.5,45.8) 136.9,45.8 138.5,44.2 v1(140.45,44.2)
NetR171_2: R171.2 U112.7 | length 5.3
  Top Layer w0.254: R171.2@148.65,42.662 148.962,42.662 149.55,43.25 149.55,43.483 149.544,43.489 149.544,44.933 150.011,45.4 150.35,45.4 150.825,44.925 U112.7@150.825,44.175
NetR172_2: R172.2 U112.5 | length 4.6
  Bottom Layer w0.3: v1(148.5,45.8) 148.9,45.8 150.5,44.2 v1(152.45,44.2)
NetR173_1: R173.1 U6.1 Z101.K | length 68.8
  Top Layer w0.254: Z101.K@19.37,1.25 19.012,1.608 R173.1@19.012,2.95 21.531,5.469 v1(21.531,8) ; v1(21.3,48.15) v1(21.3,50.7) v1@21.3,50.85
  Bottom Layer w0.254: v1(21.3,48.15) 21.3,46.5 22.75,45.05 22.75,11.05 22.35,10.65 22.35,9.5 21.531,8.681 v1(21.531,8) ; v1(21.3,50.7) 20.35,51.65 20.35,59.6 21.362,60.612 v1(27.55,60.612)
NetR174_1: R174.1 U6.2 Z102.K | length 80.5
  Top Layer w0.254: v1(21.5,2.75) 26.85,2.75 28.189,4.089 30.739,4.089 30.75,4.1 31.012,3.838 R174.1@31.012,2.95 31.012,1.608 Z102.K@31.37,1.25 ; v1(21.65,52.35) 22.65,51.35 v1(22.65,46.9) ; U6.2@27.525,59.175 28.625,59.175 v1(29,59.55)
  Bottom Layer w0.254: v1(21.5,2.75) 21.5,6.35 23.4,8.25 23.4,45.85 v1@22.5,46.75 ; v1(21.65,52.35) 20.95,53.05 20.95,58.45 22.1,59.6 28.95,59.6 v1(29,59.55)
NetR175_1: R175.1 U6.3 Z103.K | length 88.3
  Top Layer w0.254: v1(21.95,54.1) 23.55,52.5 23.55,48.5 v1(23.9,48.15) ; v1(22.95,4.2) 23.2,3.95 26.25,3.95 27.05,4.75 31.8,4.75 32.4,4.15 42.5,4.15 43.012,3.638 R175.1@43.012,2.95 43.012,1.608 Z103.K@43.37,1.25 ; U6.3@27.525,57.905 28.855,57.905 v1(29,58.05)
  Bottom Layer w0.254: v1(21.95,54.1) 21.65,54.4 21.65,58 22.5,58.85 27.85,58.85 28.65,58.05 v1(29,58.05) ; v1(22.95,4.2) 22.95,6.7 24.05,7.8 24.05,48 v1(23.9,48.15)
NetR176_1: R176.1 U6.4 Z104.K | length 89.2
  Top Layer w0.254: v1(24.8,5.45) 24.85,5.4 32.2,5.4 32.85,4.75 53.888,4.75 55.012,3.626 R176.1@55.012,2.95 55.012,1.608 Z104.K@55.37,1.25 ; v1(25.15,44.5) 26.4,45.75 26.4,50.2 v1(26.05,50.55) ; 25.6,57.95 26.915,56.635 U6.4@27.525,56.635
  Bottom Layer w0.254: v1(24.8,5.45) 24.8,44.15 v1(25.15,44.5) ; v1(25.55,57.65) 25.55,51.05 v1(26.05,50.55)
NetR177_1: R177.1 U6.15 Z105.K | length 93.6
  Top Layer w0.254: U6.15@32.975,59.175 31.875,59.175 31.012,58.312 31.012,49.988 31.65,49.35 32.65,49.35 33,49 33,46.8 v1(33.3,46.5) ; v1(33.8,6.8) 33.8,6.75 35,5.55 54.45,5.55 55.55,4.45 66.3,4.45 67.012,3.738 R177.1@67.012,2.95 67.012,1.608 Z105.K@67.37,1.25
  Bottom Layer w0.254: v1(33.3,46.5) 34.9,44.9 34.9,9.4 33.8,8.3 v1(33.8,6.8)
NetR178_1: R178.1 U6.14 Z106.K | length 101.3
  Top Layer w0.254: U6.14@32.975,57.905 32.355,57.905 31.65,57.2 31.65,50.7 32.3,50.05 33.35,50.05 34.15,49.25 v1(34.15,48.1) ; v1(35.75,7.9) 35.75,7.542 37.042,6.25 54.95,6.25 56,5.2 77.65,5.2 79.012,3.838 R178.1@79.012,2.95 79.012,1.608 Z106.K@79.37,1.25
  Bottom Layer w0.254: v1@34,48.25 v1(34.15,48.1) 35.75,46.5 v1(35.75,7.9)
NetR179_1: R179.1 U7.1 Z107.K | length 101.3
  Top Layer w0.254: Z107.K@91.37,1.25 91.012,1.608 R179.1@91.012,2.95 98.85,2.95 100.9,5 122.45,5 123.15,5.7 128.45,5.7 v1(130.9,8.15) ; v1(133,45.8) 132.75,45.8 131.5,47.05 131.5,58.4 133.545,60.445 U7.1@135.525,60.445
  Bottom Layer w0.254: v1(130.9,8.15) 130.7,8.35 130.7,29.05 133.55,31.9 133.55,45.25 v1(133,45.8)
NetR180_1: R180.1 U7.2 Z108.K | length 89.1
  Top Layer w0.254: Z108.K@103.37,1.25 103.012,1.608 R180.1@103.012,2.95 104.35,4.288 122.938,4.288 123.5,4.85 129.9,4.85 v1(131.45,6.4) ; v1(132.7,47.85) 132.5,47.85 132.65,48 132.65,58.2 133.625,59.175 U7.2@135.525,59.175
  Bottom Layer w0.254: v1(131.45,6.4) 131.789,6.739 131.789,8.518 131.4,8.907 131.4,28.65 134.15,31.4 134.15,46.4 v1(132.7,47.85)
NetR181_1: R181.1 U7.3 Z109.K | length 77.8
  Top Layer w0.254: Z109.K@115.37,1.25 115.012,1.608 R181.1@115.012,2.95 123,2.95 124.25,4.2 132.7,4.2 v1(133.15,4.6) ; v1(134.3,47.95) 133.3,48.95 133.3,56.85 134.355,57.905 U7.3@135.525,57.905
  Bottom Layer w0.254: v1(133.15,4.6) 132.339,5.411 132.339,8.687 132,9.026 132,28.25 134.75,31 134.75,47.5 v1(134.3,47.95)
NetR182_1: R182.1 U7.4 Z110.K | length 67.6
  Top Layer w0.254: Z110.K@127.37,1.25 127.012,1.608 R182.1@127.012,2.95 134.65,2.95 v1(134.8,2.8) ; U7.4@135.525,56.635 134.685,56.635 134.05,56 134.05,49.9 v1(135.95,48)
  Bottom Layer w0.254: v1(134.8,2.8) 134.8,5.3 133.2,6.9 133.2,12.7 132.7,13.2 132.7,28.05 135.4,30.75 135.4,47.45 v1(135.95,48)
NetR183_1: R183.1 U7.14 Z111.K | length 74.6
  Top Layer w0.254: Z111.K@139.37,1.25 139.012,1.608 R183.1@139.012,2.95 144.95,2.95 146.35,4.35 v1(146.35,5.45) ; v1(139.8,57.85) U7.14@140.92,57.85 ; v1(146.2,47.5) 146.2,47.7 147,48.5 v1(147,57.65)
  Bottom Layer w0.254: v1(139.8,57.85) v1@147,57.85 ; v1@146.3,47.5 142.9,44.1 142.9,9.55 146.35,6.1 v1(146.35,5.45)
NetR184_1: R184.1 U7.15 Z112.K | length 71.3
  Top Layer w0.254: 147.7,4.3 150.8,4.3 151.012,4.088 R184.1@151.012,2.95 151.012,1.608 Z112.K@151.37,1.25 ; 148,53.65 v1(148,53.35) 148,47.85 v1(148.1,47.75)
  Bottom Layer w0.254: v1(141.95,59.15) 147.25,59.15 148.2,58.2 148.2,53.55 v1(148,53.35) ; v1(147.7,4) 147.7,6 143.55,10.15 143.55,42.9 148.125,47.475 v1@148.125,47.825
NetR201_1: R201.1 R202.1 U9.3 U9.5 | length 9.5
  Top Layer w0.254: U9.3@41.05,50.325 41.775,50.325 ; U9.5@43.7,49.65 42.45,49.65 41.775,50.325 ; R202.1@43.712,56.05 43.712,55.974 R201.1@42.188,54.45 42.05,54.312 42.05,50.6 41.775,50.325
NetR301_1: R301.1 R302.2 U3.3 | length 7.3
  Top Layer w0.254: U3.3@149.025,58.325 148.75,58.325 148.35,57.925 148.35,54.763 R301.1@149.588,53.525 ; R302.2@149.588,52.075 R301.1@149.588,53.525 ; R301.1@149.588,53.625 R301.1@149.588,53.525
NetR303_1: R303.1 R304.2 U4.3 | length 7.3
  Top Layer w0.254: U4.3@17.025,58 16.75,58 16.35,57.6 16.35,54.438 R303.1@17.588,53.2 ; R304.2@17.588,51.75 R303.1@17.588,53.2 ; R303.1@17.588,53.3 R303.1@17.588,53.2
NetU1_25: U1.25 U3.4 | length 104.2
  Top Layer w0.254: v1(61,63.4) 61,63.375 U1.25@63.725,60.65 ; U3.4@151.675,58.325 U3.4@151.775,58.325
  Bottom Layer w0.254: v1(61,63.4) 63.75,66.15 151.35,66.15 153.05,64.45 153.05,59.6 152.15,58.7 v1(152.15,58.45)
NetU1_26: U1.26 U4.4 | length 50.1
  Top Layer w0.254: U4.4@19.675,58 21,58 21.7,58.7 21.7,61.5 24.55,64.35 58.9,64.35 63.1,60.15 U1.26@63.725,60.15
NetU2_19: U2.19 U9.7 | length 76.7
  Top Layer w0.254: U9.7@43.65,50.975 44.6,50.975 45.6,51.975 45.6,58.1 46.6,59.1 v1(46.8,59.1) ; v1(98.5,56.05) 98.65,56.05 99.7,57.1 U2.19@111.725,57.1
  Bottom Layer w0.254: v1(46.8,59.1) 54.25,59.1 55.85,57.5 92.45,57.5 93.9,56.05 v1(98.5,56.05)
NetU2_22: U2.22 U9.1 | length 77
  Top Layer w0.254: v1(39.8,54.5) 41.05,53.25 U9.1@41.05,51.625 ; v1(106.1,53.55) 106.15,53.55 108.2,55.6 U2.22@111.725,55.6
  Bottom Layer w0.254: v1(39.8,54.5) 58.65,54.5 60.15,53 105.55,53 v1(106.1,53.55)
NetU2_23: U2.23 U5.12 | length 68.3
  Top Layer w0.254: v1(54,57.25) 56.95,54.3 56.95,52.4 56.55,52 U5.12@55.825,52 ; 109.9,54.25 110.75,55.1 U2.23@111.725,55.1 111.35,55.1
  Bottom Layer w0.254: 54,56.86 54.01,56.86 54.1,56.95 91.65,56.95 93.85,54.75 99.15,54.75 100.8,56.4 107.8,56.4 109.7,54.5 v1(110,54.5)
NetU2_24: U2.24 U5.11 | length 59.2
  Top Layer w0.254: U5.11@55.825,51.5 57,51.5 58.2,52.7 v1(58.2,53.3) ; v1(107.55,52.85) 107.95,52.45 110.675,52.45 111.725,53.5 U2.24@111.725,54.6
  Bottom Layer w0.254: v1(58.2,53.3) 59.05,52.45 107.15,52.45 v1(107.55,52.85)
Q2_gdrv: Q2,3.1 R105.1 | length 19.5
  Top Layer w0.254: 16.5,24.15 15.75,24.15 14.35,25.55 14.35,29.1 15.1,29.85 15.1,39.95 16.288,41.138 R105.1@16.65,41.138
Q5_gdrv: Q5,6.1 R106.1 | length 14.4
  Top Layer w0.3: 18.4,31.85 v1(19.1,31.85)
  Bottom Layer w0.3: v1(16.45,44.2) 16.45,41.7 18.1,40.05 18.1,32.45 18.7,31.85 v1(19.1,31.85)
Q8_gdrv: Q8,9.1 R111.1 | length 19.5
  Top Layer w0.254: 28.5,24.15 27.75,24.15 26.35,25.55 26.35,29.1 27.1,29.85 27.1,39.95 28.288,41.138 R111.1@28.65,41.138
Q11_gdrv: Q11,12.1 R112.1 | length 13.3
  Bottom Layer w0.3: v1(28.45,44.2) 28.45,41.7 30.1,40.05 30.1,32.45 v1(30.7,31.85)
Q14_gdrv: Q14,15.1 R117.1 | length 19.5
  Top Layer w0.254: 40.5,24.15 39.75,24.15 38.35,25.55 38.35,29.1 39.1,29.85 39.1,39.95 40.288,41.138 R117.1@40.65,41.138
Q17_gdrv: Q17,18.1 R118.1 | length 13.3
  Bottom Layer w0.3: v1(40.45,44.2) 40.45,41.7 42.1,40.05 42.1,32.45 v1(42.7,31.85)
Q20_gdrv: Q20,21.1 R123.1 | length 19.5
  Top Layer w0.254: 52.5,24.15 51.75,24.15 50.35,25.55 50.35,29.1 51.1,29.85 51.1,39.95 52.288,41.138 R123.1@52.65,41.138
Q23_gdrv: Q23,24.1 R124.1 | length 13.3
  Bottom Layer w0.3: v1(52.45,44.2) 52.45,41.7 54.1,40.05 54.1,32.45 v1(54.7,31.85)
Q26_gdrv: Q26,27.1 R129.1 | length 19.5
  Top Layer w0.254: 64.5,24.15 63.75,24.15 62.35,25.55 62.35,29.1 63.1,29.85 63.1,39.95 64.288,41.138 R129.1@64.65,41.138
Q29_gdrv: Q29,30.1 R130.1 | length 13.3
  Bottom Layer w0.3: v1(64.45,44.2) 64.45,41.7 66.1,40.05 66.1,32.45 v1(66.7,31.85)
Q32_gdrv: Q32,33.1 R135.1 | length 19.5
  Top Layer w0.254: 76.5,24.15 75.75,24.15 74.35,25.55 74.35,29.1 75.1,29.85 75.1,39.95 76.288,41.138 R135.1@76.65,41.138
Q35_gdrv: Q35,36.1 R136.1 | length 13.3
  Bottom Layer w0.3: v1(76.45,44.2) 76.45,41.7 78.1,40.05 78.1,32.45 v1(78.7,31.85)
Q38_gdrv: Q38,39.1 R141.1 | length 19.5
  Top Layer w0.254: 88.5,24.15 87.75,24.15 86.35,25.55 86.35,29.1 87.1,29.85 87.1,39.95 88.288,41.138 R141.1@88.65,41.138
Q41_gdrv: Q41,42.1 R142.1 | length 13.3
  Bottom Layer w0.3: v1(88.45,44.2) 88.45,41.7 90.1,40.05 90.1,32.45 v1(90.7,31.85)
Q44_gdrv: Q44,45.1 R147.1 | length 19.5
  Top Layer w0.254: 100.5,24.15 99.75,24.15 98.35,25.55 98.35,29.1 99.1,29.85 99.1,39.95 100.288,41.138 R147.1@100.65,41.138
Q47_gdrv: Q47,48.1 R148.1 | length 13.3
  Bottom Layer w0.3: v1(100.45,44.2) 100.45,41.7 102.1,40.05 102.1,32.45 v1(102.7,31.85)
Q50_gdrv: Q50,51.1 R153.1 | length 19.5
  Top Layer w0.254: 112.5,24.15 111.75,24.15 110.35,25.55 110.35,29.1 111.1,29.85 111.1,39.95 112.288,41.138 R153.1@112.65,41.138
Q53_gdrv: Q53,54.1 R154.1 | length 13.3
  Bottom Layer w0.3: v1(112.45,44.2) 112.45,41.7 114.1,40.05 114.1,32.45 v1(114.7,31.85)
Q56_gdrv: Q56,57.1 R159.1 | length 19.5
  Top Layer w0.254: 124.5,24.15 123.75,24.15 122.35,25.55 122.35,29.1 123.1,29.85 123.1,39.95 124.288,41.138 R159.1@124.65,41.138
Q59_gdrv: Q59,60.1 R160.1 | length 13.3
  Bottom Layer w0.3: v1(124.45,44.2) 124.45,41.7 126.1,40.05 126.1,32.45 v1(126.7,31.85)
Q62_gdrv: Q62,63.1 R165.1 | length 19.5
  Top Layer w0.254: 136.5,24.15 135.75,24.15 134.35,25.55 134.35,29.1 135.1,29.85 135.1,39.95 136.288,41.138 R165.1@136.65,41.138
Q65_gdrv: Q65,66.1 R166.1 | length 13.3
  Bottom Layer w0.3: v1(136.45,44.2) 136.45,41.7 138.1,40.05 138.1,32.45 v1(138.7,31.85)
Q68_gdrv: Q68,69.1 R171.1 | length 19.5
  Top Layer w0.254: 148.5,24.15 147.75,24.15 146.35,25.55 146.35,29.1 147.1,29.85 147.1,39.95 148.288,41.138 R171.1@148.65,41.138
Q71_gdrv: Q71,72.1 R172.1 | length 13.3
  Bottom Layer w0.3: v1(148.45,44.2) 148.45,41.7 150.1,40.05 150.1,32.45 v1(150.7,31.85)
RST: P1.5 S2.2 U1.29 U2.29 | length 144.3
  Top Layer w0.254: v1(37.85,57.6) 41.85,61.6 58.75,61.6 61.7,58.65 U1.29@63.725,58.65 ; v1(85,61.75) P1.5@89.652,61.75 ; v1(85.05,58.65) 85.05,52.3 86,51.35 93.6,51.35 ; S2.2@93.673,54.515 90.435,54.515 93.6,51.35 ; v1(95.5,47.4) 95.5,49.45 93.6,51.35 ; v1(112.05,47.525) 112.05,48.3 113.1,49.35 113.8,49.35 114.45,50 U2.29@114.45,53.875
  Bottom Layer w0.254: v1(37.85,57.6) 42.7,57.6 45.2,55.1 59.35,55.1 60.75,53.7 89.35,53.7 v1(90.3,54.65) ; v1(85,61.75) 85.05,61.7 v1(85.05,58.65) ; v1(95.5,47.4) 100.3,47.4 100.85,47.95 102.6,47.95 104.1,46.45 110.975,46.45 v1(112.05,47.525)
SCK_PRGM: P1.3 R4.1 | length 14.5
  Top Layer w0.3: R4.1@76.638,63.35 76.638,63.988 77.1,64.45 85.187,64.45 86.499,63.138 P1.3@89.788,63.138
SCK_U1: R1.2 U1.17 | length 8.8
  Top Layer w0.254: U1.17@67.95,61.375 R1.2@76.775,61.375
SCK_U2: R2.1 U2.17 | length 37.7
  Top Layer w0.254: R2.1@79.762,63.212 79.938,63.212 v1(81.55,61.6) ; v1@87.65,58.7 v1(87.65,58.45) 88.25,59.05 88.775,59.05 108.458,59.05 109.408,58.1 U2.17@111.725,58.1
  Bottom Layer w0.254: v1(81.55,61.6) 82.75,62.8 86.55,62.8 87.65,61.7 v1(87.65,58.45)
SS: U1.14 U2.14 | length 53.6
  Top Layer w0.254: U1.14@68.675,59.65 109.5,59.65 v1(110.1,59.05) ; U2.14@113.45,58.825 113.45,62 v1(114.15,62.7)
  Bottom Layer w0.254: v1(110.1,59.05) 110.1,62.25 110.95,63.1 113.75,63.1 v1(114.15,62.7)
Vbat: C3.2 C4.2 C5.2 C6.2 C310.2 C312.2 L1.1 L2.1 P1.2 Q201.1 Q202.1 Q203.1 Q204.1 R6.1 R201.2 S1.1 U1.4 U1.18 U2.4 U2.18 U3.5 U4.5 U5.16 U6.16 U7.16 U9.8 U10.1 | length 309.4
  Top Layer w0.254: C312.2@17.05,62.962 17.388,63.3 18.95,63.3 19.8,62.45 L2.1@19.8,61.85 U4.5@19.8,60.025 ; U9.8@43.65,51.6 44.025,51.6 44.7,52.275 44.7,53.475 R201.2@43.725,54.45 ; R201.2@43.712,54.45 R201.2@43.725,54.45 ; v1@44.7,58.55 44.85,58.4 44.85,54.65 44.65,54.45 R201.2@43.725,54.45 ; U5.16@54.85,53.975 54.85,54.55 51.95,57.45 v1(51.95,57.7) 52.575,58.325 57.175,58.325 60.6,54.9 v1(61.6,54.9) ; C3.2@64.782,51.4 64.782,53.282 65.95,54.45 U1.4@65.95,56.425 ; v1(64.85,64.9) 64.85,65.4 66.73,67.28 Q202.1@66.73,68 ; U1.18@67.45,61.375 67.45,62.1 68.495,63.145 C4.2@68.495,63.538 69.212,63.538 v1(69.95,62.8) ; R6.1@86.538,52.8 v1(86.538,54.838) 86.538,56.738 87.1,57.3 88.35,57.3 89.537,58.487 96.75,58.487 ; 86.738,54.638 C6.2@87.95,54.638 ; P1.2@91.324,64.65 v1(93.05,64.65) ; v1(97.5,57.5) 97.5,57.737 96.75,58.487 ; v1(100.25,64.65) Q203.1@100.25,67.52 ; U2.18@111.725,57.6 111.708,57.617 108.733,57.617 107.863,58.487 96.75,58.487 ; U2.4@116.675,56.1 116.692,56.117 121.417,56.117 v1(121.45,56.15) 124.15,56.15 C5.2@124.2,56.1 ; C5.2@124.512,56.188 124.512,54.188 U10.1@125.6,53.1 ; Q204.1@134.73,68 134.73,67.37 135.95,66.15 140.7,66.15 v1(143.225,63.625) ; C310.2@149.05,63.287 149.388,63.625 v1(151.55,63.625) 151.8,63.375 L1.1@151.8,62.175 U3.5@151.8,60.35
  Top Layer w0.508: C312.2@17.05,62.962 v1(17.05,63.722) ; U6.16@32.975,60.445 v1(34.855,60.445) ; S1.1@77.555,56 78.455,56.9 80.6,56.9 v1(82.55,54.95)
  Bottom Layer w0.254: v1(93.05,64.65) 93.05,63.5 94.5,62.05 94.5,60.5 v1(97.5,57.5) 107.85,57.5 109.25,56.1 121.4,56.1 v1(121.45,56.15)
  Bottom Layer w0.508: v1(17.05,63.722) 32.828,63.722 ; v1(32.7,68) 32.7,63.85 32.828,63.722 ; v1(51.95,57.7) 45.5,57.7 v1(44.6,58.6) ; v1@61.45,55.05 v1(61.6,54.9) 61.9,54.6 v1(66.1,54.6) 76.8,54.6 v1(77.05,54.85) ; v1(64.85,64.9) 64.85,61.5 64.35,61 64.4,60.95 ; v1(69.95,62.8) 68.1,60.95 64.4,60.95 ; v1(82.55,54.95) v1@86.538,54.95 ; v1(93.05,64.65) v1(100.25,64.65) 135.2,64.65 135.8,65.25 141.6,65.25 v1(143.225,63.625) v1@143.475,63.625 ; v1(140.95,60.875) 140.95,61.1 v1@143.475,63.625 ; v1(151.55,63.625) v1@143.475,63.625 ; 32.828,63.722 34.855,61.695 v1(34.855,60.445) 36.2,59.1 44.1,59.1 v1(44.6,58.6) ; v1(44.6,58.6) 44.6,59.2 46.35,60.95 64.4,60.95
pads on no net: U1.7 U1.8 U1.19 U1.33 U2.3 U2.7 U2.8 U2.27 U2.28 U2.32 U2.33 U5.1 U5.2 U5.3 U5.6 U5.9 U5.10 U5.13 U5.14 U5.15 U5.17 U6.6 U7.6 U101.1 U101.8 U102.1 U102.8 U103.1 U103.8 U104.1 U104.8 U105.1 U105.8 U106.1 U106.8 U107.1 U107.8 U108.1 U108.8 U109.1 U109.8 U110.1 U110.8 U111.1 U111.8 U112.1 U112.8

## Polygon pours and split planes (outlines as drawn)
GND on Bottom Layer "gnd_04" (solid, remove dead copper, pour order 26): 138.15,43 140.4,43 140.4,40.9 138.15,40.9
GND on Bottom Layer "gnd_03" (solid, remove dead copper, pour order 28): 150.2,43 152.4,43 152.4,40.9 150.2,40.9
GND on Bottom Layer "gnd_05" (solid, remove dead copper, pour order 24): 126.2,43 128.4,43 128.4,40.9 126.2,40.9
GND on Bottom Layer "gnd_06" (solid, remove dead copper, pour order 22): 114.2,43 116.4,43 116.4,40.9 114.2,40.9
GND on Bottom Layer "gnd_07" (solid, remove dead copper, pour order 20): 102.2,43 104.4,43 104.4,40.9 102.2,40.9
GND on Bottom Layer "gnd_08" (solid, remove dead copper, pour order 18): 90.2,43 92.4,43 92.4,40.9 90.2,40.9
GND on Bottom Layer "gnd_08" (solid, remove dead copper, pour order 16): 78.2,43 80.4,43 80.4,40.9 78.2,40.9
GND on Bottom Layer "gnd_09" (solid, remove dead copper, pour order 14): 66.2,43 68.4,43 68.4,40.9 66.2,40.9
GND on Bottom Layer "gnd_10" (solid, remove dead copper, pour order 12): 54.2,43 56.4,43 56.4,40.9 54.2,40.9
GND on Bottom Layer "gnd_10" (solid, remove dead copper, pour order 10): 42.2,43 44.4,43 44.4,40.9 42.2,40.9
GND on Bottom Layer "gnd_11" (solid, remove dead copper, pour order 2): 30.2,43 32.4,43 32.4,40.9 30.2,40.9
GND on Bottom Layer "gnd_01" (solid, remove dead copper, pour order 0): 18.2,43 20.4,43 20.4,40.9 18.2,40.9

## Keep-outs
Keep-Out Layer:
  the board outline again, w0.762

## Silkscreen, mask and mechanical layers (free items; w line width, h text height)
Bottom Overlay:
  text "DONUts" at 162.8,59.3 h4
  text "v0" at 137.95,58.9 h2
  text "CEI-Lab 2019" at 159.7,54.25 h2
  text "Logan Hernandez Horowitz" at 38.15,2.6 h1.5
Mechanical 1:
  the board outline again, w0.762